# EAGLE board femtoduino_motor_shield (EAGLE 6.4)
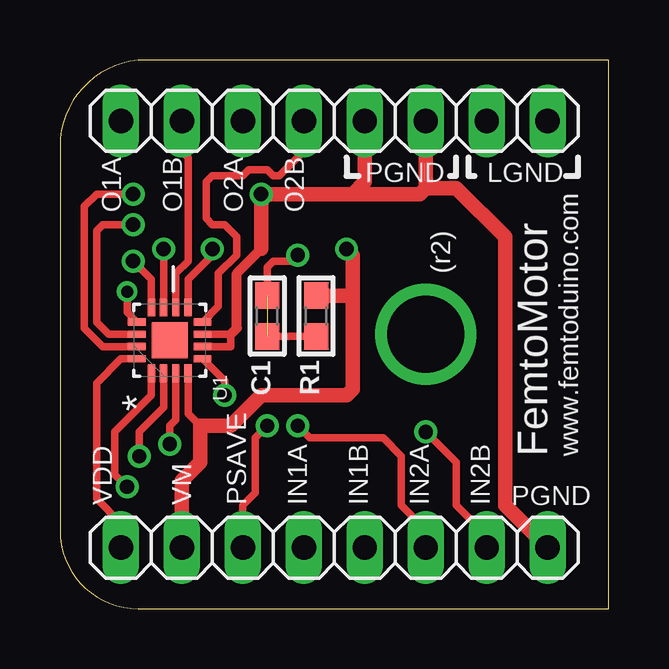
[diagram p0: board, top side]
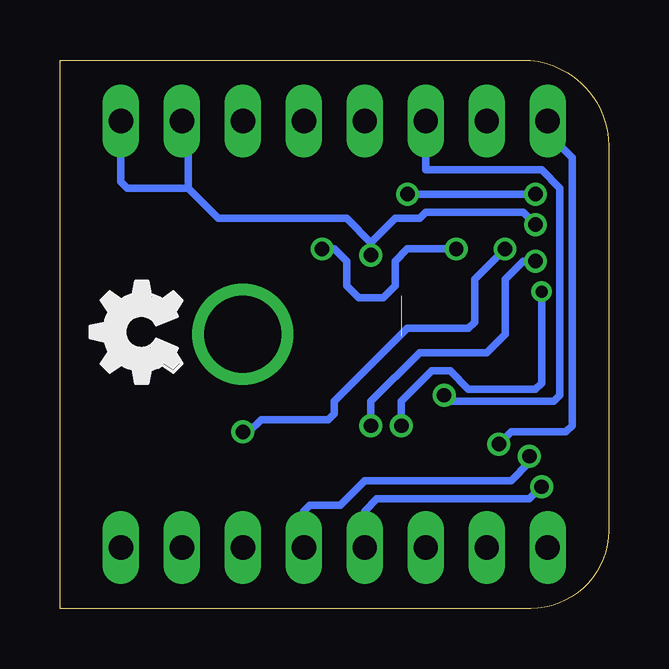
[diagram p1: board, bottom side, seen from below]

Size 22.86 x 22.86 mm. Coordinates in mm from the lower left corner, seen from the top.
Outline: 0,19.27 0,3.25 arc90 3.25,0 22.86,0 22.86,22.86 3.59,22.86 arc90 0,19.27
Copper layers (1*16): Top 0.0356mm / dielectric 1.5011mm / Bottom 0.0356mm
Design rules "LaenPCBOrder": minimum track width 6mil, minimum drill 13mil, track to track 6mil, track to pad 6mil, pad to pad 6mil, via to via 6mil, smd to smd 6mil, copper to edge 15mil, drill to drill 6mil, minimum pad ring 7mil, minimum via ring 7mil, stop-mask expansion 4mil, vias tented up to drill 0mil, thermal gap 10mil

## Footprints (pad centres in the part's own frame; a part is rotated, then mirrored left to right if it is on the bottom)
0603 = smd 1.1 x 1: 1 -0.85,0; 2 0.85,0
1X08 = drill 1.016 long: 1 -8.89,0; 2 -6.35,0; 3 -3.81,0; 4 -1.27,0; 5 1.27,0; 6 3.81,0; 7 6.35,0; 8 8.89,0
QFN50P300X300X100-17N = smd 0.737 x 0.305: 1 -1.372,0.762; 2 -1.372,0.254; 3 -1.372,-0.254; 4 -1.372,-0.762; 9 1.372,-0.762; 10 1.372,-0.254; 11 1.372,0.254; 12 1.372,0.762 | smd 0.305 x 0.737: 5 -0.762,-1.372; 6 -0.254,-1.372; 7 0.254,-1.372; 8 0.762,-1.372; 13 0.762,1.372; 14 0.254,1.372; 15 -0.254,1.372; 16 -0.762,1.372 | smd 1.499 x 1.499: 17 0,0

## Placement (x,y rotation side)
C1  0.01uF  [0603]  8.64,12.19 90 top
JP1  [1X08]  11.43,2.54 0 top
JP2  [1X08]  11.43,20.32 0 top
R1  10k  [0603]  10.67,12.19 270 top
U1  H-BRIDGE  [QFN50P300X300X100-17N]  4.57,11.18 90 top
U$1  [OSHW_FILLX150_NOTEXT]  17.78,9.4 90 bottom

## Library data of the parts
C1 R1 = microbuilder
JP1 JP2 = pinhead
U1 = Freescale_By_element14_Batch_1; MPN: MPC17C724EP; OC_FARNELL: -; OC_NEWARK: 53J3340; PACKAGE: QFN-16; SUPPLIER: FREESCALE SEMICONDUCTOR
U$1 = ohw-logo

## Nets
GND: C1.1 C1.2 JP2.7 JP2.8 R1.2 U1.14
IN1A: JP1.4 U1.1
IN1B: JP1.5 U1.2
IN2A: JP1.6 U1.12
IN2B: JP1.7 U1.11
OUT1A: JP2.1 U1.3
OUT1B: JP2.2 U1.10
OUT2A: JP2.3 U1.5
OUT2B: JP2.4 U1.8
PGND: JP1.8 JP2.5 JP2.6 U1.6 U1.7 U1.15
PSAVE: JP1.3 U1.13
VDD: JP1.1 U1.16
VM1: JP1.2 R1.1 U1.4 U1.9

## Tracks (layer width: path | path; a pad name or v marks a point on that pad's centre or on a via)
GND  (via drill 0.6)  (1 unrouted)
  Top 0.305: U1.14 2.03,11.43 1.52,11.94 1.52,15.75 1.78,16 v3.05,16 | C1.1 R1.2 | C1.2 8.64,14.22 8.89,14.48 9.65,14.48 v9.91,14.73
  Bottom 0.305: v3.05,16 3.56,16.51 7.62,16.51 7.87,16.26 8.89,16.26 9.91,15.24 | 9.91,15.24 v9.91,14.73 | JP2.7 17.53,20.07 17.53,17.53 | 17.53,17.53 16.26,16.26 10.92,16.26 9.91,15.24 | JP2.8 20.32,17.78 20.07,17.53 17.53,17.53
IN1A  (via drill 0.6)
  Top 0.305: U1.1 3.81,8.89 2.29,7.37 2.29,5.59 v2.79,5.08
  Bottom 0.305: JP1.4 10.16,4.06 9.65,4.57 3.3,4.57 v2.79,5.08
IN1B  (via drill 0.6)
  Top 0.305: U1.2 4.32,8.38 3.3,7.37 v3.3,6.35
  Bottom 0.305: JP1.5 12.7,4.06 12.45,4.32 11.18,4.32 10.16,5.33 4.06,5.33 3.3,6.1 v3.3,6.35
IN2A  (via drill 0.6)
  Top 0.305: U1.12 3.81,13.72 v3.05,14.48 | v9.91,7.62 10.41,7.11 13.46,7.11 14.22,6.35 14.22,4.32 15.24,3.3 JP1.6
  Bottom 0.305: v9.91,7.62 9.91,8.64 7.87,10.67 5.08,10.67 4.32,11.43 4.32,13.72 3.56,14.48 v3.05,14.48
IN2B  (via drill 0.6)
  Top 0.305: U1.11 v4.32,14.99 | v15.24,7.37 16.51,6.1 16.51,4.32 17.78,3.05 JP1.7
  Bottom 0.305: v4.32,14.99 5.59,13.72 5.59,11.94 5.84,11.68 8.38,11.68 11.43,8.64 11.43,8.13 11.68,7.87 14.48,7.87 14.99,7.37 v15.24,7.37
N$1  (via drill 3.2 pad 2.54)
  other vias: 15.24,11.43
OUT1A  (via drill 0.6)
  Top 0.305: U1.3 4.83,7.87 4.57,7.62 v4.57,6.86
  Bottom 0.305: v4.57,6.86 4.06,7.37 1.78,7.37 1.52,7.62 1.52,18.8 2.54,19.81 JP2.1
OUT1B
  Top 0.305: U1.10 4.83,13.97 5.33,14.48 5.33,18.8 5.08,19.05 JP2.2
OUT2A  (via drill 0.6)
  Top 0.305: U1.5 6.86,9.5 v6.86,8.89
  Bottom 0.305: v6.86,8.89 6.6,8.64 2.29,8.64 2.03,8.89 2.03,17.53 2.79,18.29 7.62,18.29 JP2.3
OUT2B
  Top 0.305: U1.8 6.6,12.6 6.6,13.97 7.37,14.73 7.37,15.49 6.86,16 6.35,16 6.1,16.26 6.1,17.78 6.35,18.03 7.62,18.03 7.87,18.29 8.64,18.29 8.89,18.03 9.14,18.03 10.16,19.05 JP2.4
PGND  (via drill 0.6)
  Top 0.305: U1.6 7.11,10.92 7.11,11.43 U1.7 | U1.15 1.78,10.92 1.02,11.68 1.02,16.76 1.52,17.27 v3.05,17.27
  Top 0.406: 7.11,11.43 7.37,11.68 7.37,13.97 8.38,14.99
  Top 0.61: JP1.8 18.54,4.32 18.54,15.49 16.51,17.53 15.24,17.53 | 8.38,14.99 v8.38,17.27 12.19,17.27 | 12.19,17.27 14.99,17.27 15.24,17.53 | 15.24,17.53 JP2.6 | JP2.5 12.7,17.78 12.19,17.27
  Bottom 0.305: v8.38,17.27 v3.05,17.27
PSAVE  (via drill 0.5 pad 0.25, 0.6)
  Top 0.305: U1.13 2.79,12.34 v2.79,13.21 | v8.64,7.62 8.13,7.11 8.13,4.83 7.62,4.32 JP1.3
  Bottom 0.305: v2.79,13.21 2.79,9.4 3.05,9.14 5.84,9.14 6.6,9.91 7.37,9.91 8.64,8.64 v8.64,7.62
VDD
  Top 0.305: U1.16 2.54,10.41 1.52,9.4 1.52,4.57 2.54,3.56 JP1.1
VM1  (via drill 0.6)
  Top 0.305: U1.9 5.33,13.72 6.35,14.73 v6.35,14.99 | U1.4 5.33,8.13 5.84,7.62
  Top 0.406: 12.19,14.73 v11.94,14.99
  Top 0.61: JP1.2 5.08,5.33 5.84,6.1 5.84,7.62 7.11,7.62 8.38,8.89 11.94,8.89 12.19,9.14 12.19,13.04 | R1.1 12.19,13.04 | 12.19,13.04 12.19,14.73
  Bottom 0.305: v6.35,14.99 8.38,14.99 8.89,14.48 8.89,13.46 9.4,12.95 10.41,12.95 10.92,13.46 10.92,14.48 11.43,14.99 v11.94,14.99

## Text on the board
tNames: PGND | LGND | O1A | O1B | O2A | O2B | (r2) | FemtoMotor | www.femtoduino.com | VDD | VM | PSAVE | IN1A | IN1B | IN2A | IN2B | PGND